# Altium PCB watch_PCB.PcbDoc
Units mm, origin at the board's own origin, x right, y up, seen from the top; angles counter-clockwise.
Board outline 152.4 x 101.6 mm, 2 copper layers (Top Layer, Bottom Layer); 64 components, 43 nets, 231 pads, 24 vias.
Unrouted connection lines stored in the file: 90.
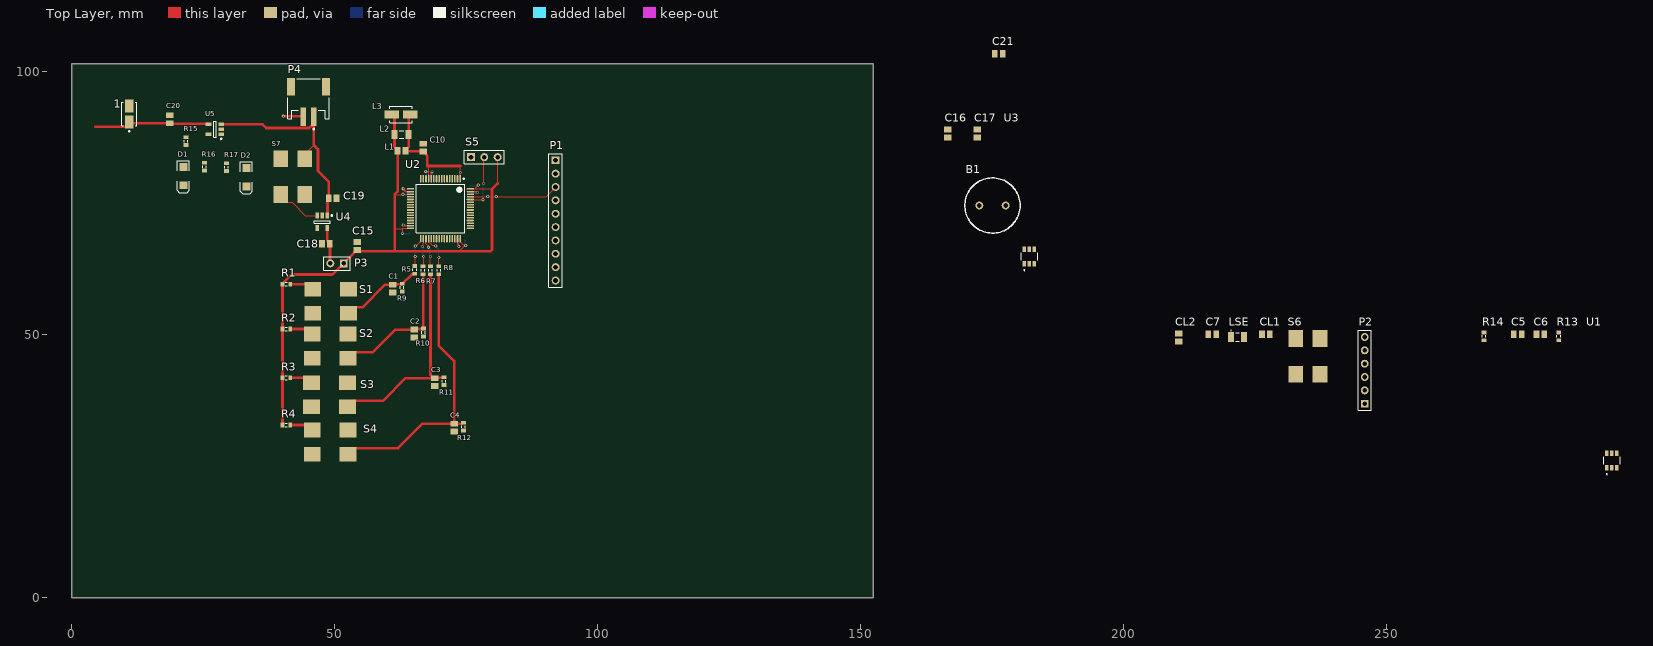
[diagram p0: Top Layer view]
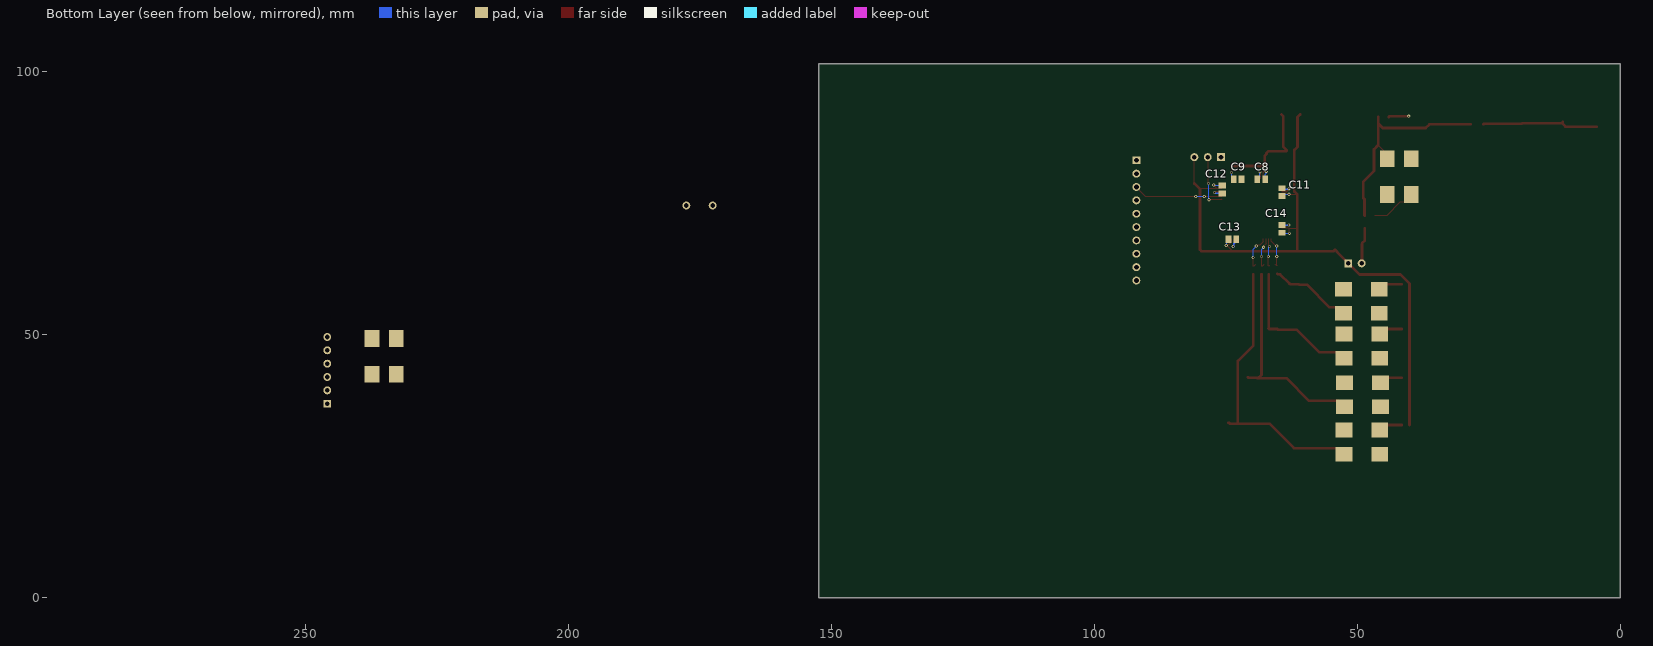
[diagram p1: Bottom Layer view, seen from below]

## Layer stack, top to bottom
Top Solder: solder mask 0.0102, Solder Resist, Dk 3.5
Top Layer: signal copper 0.035
Dielectric 1: dielectric 0.32, FR-4, Dk 4.8
Bottom Layer: signal copper 0.035
Bottom Solder: solder mask 0.0102, Solder Resist, Dk 3.5

## Board outline
0,0 152.4,0 152.4,101.6 0,101.6

## Design rules (kind name [scope] priority, off if disabled: settings)
Clearance [All] p1: gap=0.254 ignorepadtopadclearanceinfootprint=TRUE except(0: SMDPad-Hole THPad-Hole Via-Hole Fill-Hole Poly-Hole Region-Hole Text-Hole; 0.1: Arc-Arc Arc-Track Arc-SMDPad Arc-THPad Arc-Via Arc-Fill Arc-Poly Arc-Region Arc-Text Arc-Hole Track-Track Track-SMDPad Track-THPad Track-Via Track-Fill Track-Poly Track-Region Track-Text Track-Hole)
DiffPairsRouting [All] p1: maxlimit=0.254 minlimit=0.254 mostfreqgap=0.254 toplayer_minwidth=0.152 toplayer_maxwidth=0.381 toplayer_prefwidth=0.152 bottomlayer_minwidth=0.152 bottomlayer_maxwidth=0.381 bottomlayer_prefwidth=0.152 maxuncoupledlength=12.7
PolygonConnect [All] p1: connectstyle=Relief reliefconductorwidth=0.254 reliefentries=4 polygonreliefangle="90 Angle" airgapwidth=0.254
RoutingVias [All] p1: holewidth=0.33 width=0.6 viastyle="Through Hole" minholewidth=0.33 minwidth=0.6 maxholewidth=0.33 maxwidth=0.6
SolderMaskExpansion [All] p1: expansion=0.102 istentingtop=FALSE
Width trace_widths [All] p1: maxlimit=0.508 minlimit=0.152 preferedwidth=0.152 toplayer_minwidth=0.152 bottomlayer_prefwidth=0.152 minimp=50.000000 maximp=50.000000 favimp=50.000000
29 further rules are at their usual default settings.

## Classes and differential pairs
component class power_supply: 1 C18 C19 C20 C21 D1 D2 P3 P4 R15 R16 R17 S7 U4 U5
component class Motor_Driver_Schematic: B1 C16 C17 U3
component class MCU_Connections: C5 C6 C7 C8 C9 C10 C11 C12 C13 C14 C15 CL1 CL2 L1 L2 L3 LSE P1 P2 R13 R14 S5 S6 U1 U2
component class Button_connections: C1 C2 C3 C4 R1 R2 R3 R4 R5 R6 R7 R8 R9 R10 R11 R12 S1 S2 S3 S4
differential pair USB_D: +USB_D_P -USB_D_N

## Components (designator, comment, footprint, x,y, rotation, side; value= is the part's Value field where it differs from the comment)
1 "SMAJ5.0A-E3/5A" VISH-DO-214AC-2_N 10.9,92 r90 top
B1 "Motor: 316040004" RB5-10.5 175.1,74.6 r0 top
C1 "Cap" C0805 61.029,58.8 r90 top value=100nF
C2 "Cap" C0805 65.1,50.25 r90 top value=100nF
C3 "Cap" C0805 69,41 r90 top value=100nF
C4 "Cap" C0805 72.7,32.35 r90 top value=100nF
C5 "Cap" C0805 274.999,50.1 r0 top value=1uF
C6 "Cap" C0805 279.299,50.1 r0 top value=100nF
C7 "Cap" C0805 216.9,50.1 r0 top value=100nF
C8 "Cap" C0805 68.25,79.6 r180 bottom value=1uF
C9 "Cap" C0805 72.75,79.6 r0 bottom value=1uF
C10 "Cap" C0805 66.8,85.6 r270 top value=10nF
C11 "Cap" C0805 64.3,77.15 r270 bottom value=100nF
C12 "Cap" C0805 75.7,77.65 r90 bottom value=100nF
C13 "Cap" C0805 73.75,68.2 r0 bottom value=100nF
C14 "Cap" C0805 64.3,70.15 r270 bottom value=100nF
C15 "Cap" C0805 54.3,66.9 r270 top value=10uF
C16 "Cap" C0805 166.6,88.3 r90 top value=1uF
C17 "Cap" C0805 172.2,88.3 r90 top value=100nF
C18 "Cap" C0805 48.3,67.3 r0 top value=1uF
C19 "Cap" C0805 49.6,76 r180 top value=1uF
C20 "Cap" C0805 18.6,91 r270 top value=4.7uF
C21 "Cap" C0805 176.3,103.5 r0 top value=4.7uF
CL1 "Cap" C0805 227.099,50.1 r0 top value=TBD
CL2 "Cap" C0805 210.5,49.5 r90 top value=TBD
D1 "Orange LED" 3.2X1.6X1.1 21.2,80.2 r270 top
D2 "Green LED" 3.2X1.6X1.1 33.2,80 r270 top
L1 "" C0805 62.7,85 r180 top
L2 "" C1206 62.7,88.1 r180 top
L3 "35F0121-0SR-10" LIRD-35F0121-0SR-10_V 62.6,91.9 r180 top
LSE "CM315D32768HZFT" CMHT-CM315D-2_V 221.7,49.6 r0 top
P1 "LCD receptile" HDR1X10 92,83.2 r270 top
P2 "SWD connecctor" HDR1X6 245.899,36.9 r90 top
P3 "Header 2" HDR1X2 51.7,63.6 r180 top
P4 "JST-PH connector" "JST- S2B-PH-SM4-TB(LF)(SN)-2_V" 45,94.9 r180 top
R1 "Res3" J1-0603 40.8,59.65 r180 top value=100
R2 "Res3" J1-0603 40.8,51.1 r180 top value=100
R3 "Res3" J1-0603 40.8,41.85 r180 top value=100
R4 "Res3" J1-0603 40.8,32.85 r180 top value=100
R5 "Res3" J1-0603 65.2,62.35 r270 top value=10k
R6 "Res3" J1-0603 66.8,62.3 r270 top value=10k
R7 "Res3" J1-0603 68.2,62.3 r270 top value=10k
R8 "Res3" J1-0603 69.8,62.3 r270 top value=10k
R9 "Res3" J1-0603 62.814,59 r90 top value=10k
R10 "Res3" J1-0603 66.886,50.45 r90 top value=10k
R11 "Res3" J1-0603 70.786,41.2 r90 top value=10k
R12 "Res3" J1-0603 74.486,32.55 r90 top value=10k
R13 "Res3" J1-0603 282.799,49.7 r90 top value=40K
R14 "Res3" J1-0603 268.599,49.7 r90 top value=100K
R15 "Res3" J1-0603 21.7,86.85 r90 top value=10K
R16 "Res3" J1-0603 25.2,82 r270 top value=470
R17 "Res3" J1-0603 29.4,81.9 r90 top value=470
S1 "SW-DPST" PCBComponent_1 48,55.2 r180 top
S2 "SW-DPST" PCBComponent_1 47.9,46.65 r180 top
S3 "SW-DPST" PCBComponent_1 47.8,37.4 r180 top
S4 "SW-DPST" PCBComponent_1 47.9,28.4 r180 top
S5 "SW-SPDT" HDR1X3 75.9,83.8 r0 top
S6 "SW-DPST" PCBComponent_1 233.899,47.1 r90 top
S7 "SW-DPST" PCBComponent_1 40.8,81.3 r90 top
U1 "TPS22860DBVR" DBV0006A_N 292.899,26.1 r90 top value=Value
U2 "STM32L073RZT6" STM-LQFP64_M 70.1,74 r270 top
U3 "TPS22860DBVR" DBV0006A_N 182.1,64.9 r90 top value=Value
U4 "LD39015M33R" SOT23-5L_N 47.6,71.5 r270 top
U5 "MCP73831T-2ATI/OT" SOT-23-OT5_N 27.2,89.1 r180 top

## Footprints (in the part's own frame and the unit in brackets; to place one, negate y for a bottom-side part, rotate by r counter-clockwise, add the part's x,y. Pads: shape width x height; smd on the part's side, far side on the other; paste and mask are expansions set on the pad)
3.2X1.6X1.1 [mm] "SMT LED; 2 Flat Leads"
  rect 1.5x1.5 smd: 1(-1.75,0) 2(1.75,0)
  silkscreen extent -2.9,-1.15 3.2,1.15
C0805 [mm] "Chip Capacitor, Body 2.0x1.3mm, IPC High Density"
  rect 1.1x1.4 smd: 1(-0.75,0) 2(0.75,0)
  body extent -1.1,-0.72 1.1,0.72, height 1.4
C1206 [mm] "Chip Capacitor, Body 3.2x1.6mm, IPC High Density"
  rect 1.1x1.7 smd: 1(-1.35,0) 2(1.35,0)
  silkscreen extent -0.4,-0.75 0.4,0.75, body extent -1.7,-0.9 1.7,0.9, height 1.3
CMHT-CM315D-2_V [mm] "SMD, 2-Leads, Body 1.60x3.30mm, Pitch 2.50mm"
  rect 1.1x1.9 smd: 1(-1.25,0) 2(1.25,0)
  silkscreen extent -1.3,-0.8 0.3,1.32, body extent -1.65,-0.8 1.65,0.8, height 0.9
DBV0006A_N [mil]
  rect 41x24 smd paste+0 mask+3: 1(-53.15,37.4) 2(-53.15,0) 3(-53.15,-37.4) 4(53.15,-37.4) 5(53.15,0) 6(53.15,37.4)
  silkscreen extent -105,-62 29,62, body extent 0,0 10,10, height 10
HDR1X2 [mm] "Connector; Header; 2 Position"
  rect 1.5x1.5 hole 0.9: 1(0,0)
  round 1.5 hole 0.9: 2(2.54,0)
  silkscreen extent -1.27,-1.27 3.81,1.27
HDR1X3 [mm] "Connector; Header; 3 Position"
  rect 1.5x1.5 hole 0.9: 1(0,0)
  round 1.5 hole 0.9: 2(2.54,0) 3(5.08,0)
  silkscreen extent -1.27,-1.27 6.35,1.27
HDR1X6 [mm] "Connector; Header; 6 Position"
  rect 1.5x1.5 hole 0.9: 1(0,0)
  round 1.5 hole 0.9: 2(2.54,0) 3(5.08,0) 4(7.62,0) 5(10.16,0) 6(12.7,0)
  silkscreen extent -1.27,-1.27 13.97,1.27
HDR1X10 [mm] "Connector; Header; 10 Position"
  rect 1.5x1.5 hole 0.9: 1(0,0)
  round 1.5 hole 0.9: 2(2.54,0) 3(5.08,0) 4(7.62,0) 5(10.16,0) 6(12.7,0) 7(15.24,0) 8(17.78,0) 9(20.32,0) 10(22.86,0)
  silkscreen extent -1.27,-1.27 24.13,1.27
J1-0603 [mm] "Chip Resistor, Body 1.6x0.8mm, IPC High Density"
  rect 0.7x0.9 smd: 1(-0.75,0) 2(0.75,0)
  silkscreen extent -0.2,-0.35 0.2,0.35, body extent -0.85,-0.48 0.85,0.48, height 0.9
"JST- S2B-PH-SM4-TB(LF)(SN)-2_V" [mm] "SMD, 2-Leads, Body 7.9x7.6mm, Pitch 2mm"
  rect 1x3.5 smd: 1(-1,3.45) 2(1,3.45)
  rect 1.5x3.4 smd: MP1(-3.35,-2.3) MP2(3.35,-2.3)
  silkscreen extent -3.95,-3.8 3.95,5.87, body extent -3.95,-3.8 3.95,4.8, height 5.6
LIRD-35F0121-0SR-10_V [mm] "Molded Inductor, 2-Leads, Body 4.16x3.13mm"
  rect 2.77x1.47 smd: 1(-1.79,0) 2(1.79,0)
  silkscreen extent -2.1,-1.6 2.1,1.6, body extent -2.3,-1.57 2.3,1.57, height 3.05
PCBComponent_1 [mm]
  rect 3.2x2.8 all layers, no hole: 1(-4.6,1.1) 2(2.2,-3.5) 3(2.2,1.1) 4(-4.6,-3.5)
RB5-10.5 [mm] "Capacitor (Radial); 2 Leads"
  round 1.5 hole 0.9: 1(-2.5,0) 2(2.5,0)
  silkscreen extent -5.25,-5.25 5.25,5.25
SOT23-5L_N [mm] "SOT23, 5-Leads, Body 2.9x1.6mm, Pitch 0.95mm, Lead Span 2.8mm, IPC Medium Density"
  rect 1.1x0.65 smd: 1(-1.2,0.95) 2(-1.2,0) 3(-1.2,-0.95) 4(1.2,-0.95) 5(1.2,0.95)
  silkscreen extent -1.32,-1.5 0.25,1.95, body extent -0.87,-1.5 0.87,1.5, height 1.45
SOT-23-OT5_N [mm] "SOT23, 5-Leads, Body 2.9x1.7mm, Pitch 0.95mm, Lead Span 2.8mm, IPC Medium Density"
  rect 1.1x0.65 smd: 1(-1.2,0.95) 2(-1.2,0) 3(-1.2,-0.95) 4(1.2,-0.95) 5(1.2,0.95)
  silkscreen extent -1.33,-1.55 0.25,1.95, body extent -0.9,-1.55 0.9,1.55, height 1.45
STM-LQFP64_M [mm] "QFP, 64-Leads, Body 10x10mm, Pitch 0.5mm, IPC Low Density"
  oval 1.4x0.3 smd: 1(-5.7,3.75) 2(-5.7,3.25) 3(-5.7,2.75) 4(-5.7,2.25) 5(-5.7,1.75) 6(-5.7,1.25) 7(-5.7,0.75) 8(-5.7,0.25) 9(-5.7,-0.25) 10(-5.7,-0.75) 11(-5.7,-1.25) 12(-5.7,-1.75) 13(-5.7,-2.25) 14(-5.7,-2.75) 15(-5.7,-3.25) 16(-5.7,-3.75) 33(5.7,-3.75) 34(5.7,-3.25) 35(5.7,-2.75) 36(5.7,-2.25) 37(5.7,-1.75) 38(5.7,-1.25) 39(5.7,-0.75) 40(5.7,-0.25) 41(5.7,0.25) 42(5.7,0.75) 43(5.7,1.25) 44(5.7,1.75) 45(5.7,2.25) 46(5.7,2.75) 47(5.7,3.25) 48(5.7,3.75)
  oval 0.3x1.4 smd: 17(-3.75,-5.7) 18(-3.25,-5.7) 19(-2.75,-5.7) 20(-2.25,-5.7) 21(-1.75,-5.7) 22(-1.25,-5.7) 23(-0.75,-5.7) 24(-0.25,-5.7) 25(0.25,-5.7) 26(0.75,-5.7) 27(1.25,-5.7) 28(1.75,-5.7) 29(2.25,-5.7) 30(2.75,-5.7) 31(3.25,-5.7) 32(3.75,-5.7) 49(3.75,5.7) 50(3.25,5.7) 51(2.75,5.7) 52(2.25,5.7) 53(1.75,5.7) 54(1.25,5.7) 55(0.75,5.7) 56(0.25,5.7) 57(-0.25,5.7) 58(-0.75,5.7) 59(-1.25,5.7) 60(-1.75,5.7) 61(-2.25,5.7) 62(-2.75,5.7) 63(-3.25,5.7) 64(-3.75,5.7)
  silkscreen extent -5.82,-4.6 4.6,4.6, body extent -5,-5 5,5, height 1.6
VISH-DO-214AC-2_N [mm] "DO-214AC, 2-Leads, Body 4.5x2.79mm, IPC Medium Density"
  rect 2.4x1.55 smd: 1(-1.525,0) 2(1.525,0)
  silkscreen extent -3.4,-1.4 2.25,1.4, body extent -2.25,-1.4 2.25,1.39, height 2.29

## Part data
1: library part CMP-0548-00320-1, "Transient Voltage Suppressor, 6.40 to 231 V, 5 V Stand-off Voltage, Uni-Directional, -55 to 155 degC, 2-pin DO-214AC, Pb-Free, Tape and Reel", Manufacturer="Vishay Semiconductor", Operating Junction and Storage Temperature Range="-55 to 150 degC", ComponentLink1Description="Manufacturer URL", ComponentLink1URL=http://www.vishay.com/, ComponentLink2Description=Datasheet, ComponentLink2URL=http://www.vishay.com/docs/88390/smaj50a.pdf, ComponentLink3Description="Package Specification", ComponentLink3URL=http://www.vishay.com/docs/88390/smaj50a.pdf, DatasheetVersion=12/8/2013, ID (uA)=800, IFSM="40 A", Mounting Technology="Surface Mount", PackageDescription="2-Pin DO-214AC (SMA), Body 4.245 x 2.665 mm", PackageReference=DO-214AC-2, Packing="Tape and Reel", PartNumber=SMAJ5.0A-E3/5A, PPPM (W)="400, 300", RoHS=TRUE, VBR Uni-Directional (V)="6.4 to 231", VWM (V)=5
B1: library part Motor, "Motor, General Kind", LatestRevisionDate=17-Jul-2002, LatestRevisionNote="Re-released for DXP Platform.", PackageDescription="Capacitor (Radial); 2 Leads", PackageReference=RB5-10.5, Published=24-Mar-1999, Publisher="Altium Limited"
C1 C2 C3 C4 C5 C6 C7 C8 C9 C10 C11 C12 C13 C14 C15 C16 C17 C18 C19 C20 C21 CL1 CL2: "Capacitor", LatestRevisionDate=17-Jul-2002, LatestRevisionNote="Re-released for DXP Platform.", PackageDescription="Radial Cap, Thru-Hole; 2 Leads; 0.3 in Pin Spacing", PackageReference=RAD-0.3, Published=8-Jun-2000, Publisher="Altium Limited"
D1 D2: library part LED2, "Typical RED, GREEN, YELLOW, AMBER GaAs LED", LatestRevisionDate=17-Jul-2002, LatestRevisionNote="Re-released for DXP Platform.", PackageDescription="SM LED; 2 Flat Leads", PackageReference=3.2X1.6X1.1, PackageVersion=Feb-2002, Published=8-Jun-2000, Publisher="Altium Limited"
L1 L2: library part Inductor, "Inductor", Code_IEC=1005, Code_JEITA=0402, LatestRevisionDate=29-May-2009, LatestRevisionNote="IPC-7351 Footprint Added.", PackageDescription="Chip Inductor", PackageReference=0402-A, Published=8-Jun-2000, Publisher="Altium Limited"
L3: library part CMP-2000-05596-1, "EMI Filtering & RF Inductor, 10 A, 0.75 mOhm, -40 to 125 degC, 2-Pin SMD, RoHS, Tape and Reel", Current Rating (Max)=10A, DC Resistance (DCR) (Max)=0.75mOhm, Impedance @ Frequency=41Ohm@100MHz, Manufacturer=Laird, Operating Temperature=-40°C~125°C, Package / Case=2-SMD,J-Lead, Package Description="2-Pin Surface Mount Device, Body 4.06 x 3.05 mm", Ratings=-, Standard Package=1, Catalog Drawings=(28,35)F0121-0SR-10, Category=Filters, Datasheet URL=https://assets.lairdtech.com/home/brandworld/files/35F0121-0SR-10.pdf, Datasheet Version="Rev. F, 04/2015", Family=FerriteBeadsandChips, Filter Type=PowerLine, Kits=240-2227-ND-KITEMIFERRITEBEADCHIPSMD, Manufacturer URL=https://www.lairdtech.com/, Mounting Technology=SurfaceMount, Mounting Type=SurfaceMount, Number of Lines=1, Online Catalog=ChipBeads-PowerFiltering, Other Names=240-2520-1, Package Reference=35F0121-0SR-10, Package URL=http://cdn.lairdtech.com/home/brandworld/files/35F0121-0SR-10.pdf, Packaging=CutTape(CT), Series=35
LSE: library part CMP-2000-05089-1, "Turning Fork Crystal Unit, 32.768 KHz, -40 to 85 degC, 2-Pin SMD, RoHS, Tape and Reel. Note: Part from altium library is a DZFT, renamed to HZFT to reflect part that's actually going to be used", Manufacturer="Citizen Micro HumanTech", Package Description="2-Pin Surface Mount Device, Body 1.6 x 3.3 mm, Pitch 2.5 mm", Package Reference=CM315D-2, Package Version="Rev. 1.4, 09/2012", Datasheet URL=http://cfm.citizen.co.jp/english/product/pdf/CM315D.pdf, Datasheet Version="Rev. 1.4, 09/2012", Manufacturer URL=http://www.citizen-systems.com/us/start, Package URL=http://cfm.citizen.co.jp/english/product/pdf/CM315D.pdf
P1: library part "Header 10", "Header, 10-Pin", LatestRevisionDate=17-Jul-2002, LatestRevisionNote="Re-released for DXP Platform.", Publisher="Altium Limited"
P2: library part "Header 6", "Header, 6-Pin", LatestRevisionDate=17-Jul-2002, LatestRevisionNote="Re-released for DXP Platform.", Publisher="Altium Limited"
P3: "Header, 2-Pin", LatestRevisionDate=17-Jul-2002, LatestRevisionNote="Re-released for DXP Platform.", Publisher="Altium Limited"
P4: library part CMP-1755-00001-1, "Male Header, Pitch 2 mm, 1 x 2 Position, Height 5.5 mm, -25 to 85 degC, RoHS, Tape and Reel", Colour=Black, Current Rating="3 A", Max Operating Temperature=105degC, Min Operating Temperature=-65degC, Package Quantity=100, ComponentLink1Description="Manufacturer URL", ComponentLink1URL=http://www.jst.com/home2.html, ComponentLink2Description=Datasheet, ComponentLink2URL=http://www.jst-mfg.com/product/pdf/eng/ePH.pdf, Contact Finish=Lead, Contact Material=Bronze, Contact Plating=Tin, DatasheetVersion=Dec-12, Height="8.13 mm", Lead Pitch="0.1 inch", Length="101.19 mm", Mount="Through Hole", PackageDescription="Male Header, Pitch 2 mm, 1 x 2 Position, Height 5.5 mm", PackageReference=S2B-PH-SM4-TB(LF)(SN)-2, Packaging=Bulk, Pins=40, Radiation Hardening=No, RoHSCompliant=True, Width="2.34 mm"
R1 R2 R3 R4 R5 R6 R7 R8 R9 R10 R11 R12 R13 R14 R15 R16 R17: "Resistor", LatestRevisionDate=29-May-2009, LatestRevisionNote="IPC-7351 Footprint Added.", PackageDescription="Chip Resistor", PackageReference=J1-0603, Published=8-Jun-2000, Publisher="Altium Limited"
S1 S2 S3 S4 S6 S7: "Double-Pole, Single-Throw Switch", LatestRevisionDate=17-Jul-2002, LatestRevisionNote="Re-released for DXP Platform.", PackageDescription="Switch; 4 Leads", PackageReference=DPST-4, Published=24-Mar-1999, Publisher="Altium Limited"
S5: "SPDT Subminiature Toggle Switch, Right Angle Mounting, Vertical Actuation", ComponentLink1Description="Manufacturer Link", ComponentLink1URL=http://www.apem.com, DatasheetVersion=05-Dec-2000, LatestRevisionDate=17-Dec-2003, LatestRevisionNote="Schematic revised, PCB Footprint replaced.", PackageDescription="Switch; 4 Leads", PackageReference=TL36WW15050, Published=24-Mar-1999, Publisher="Altium Limited"
U1 U3: "small ultra-low leakage current single channel load switch", Manufacturer="Texas Instruments", Built_By=Texas_Instrument_Team, CompType=IC, Copyright="Copyright (C) 2018 Accelerated Designs. All rights reserved", Manufacturer_Part_Number=TPS22860DBVR, MountType=SMT, PackageReference=DBV0006A, PartNumber=TPS22860DBVR, RefDes=RefDes, RoHS=Y, Type=DEV, Vendor="Texas Instruments"
U2: library part CMP-1546-00073-1, "Ultra-Low-Power ARM Cortex-M0+ MCU, 192 KB Flash, 20 KB Internal RAM, 51 I/Os, 64-Pin LQFP, -40 to 85 degC, Tray", I/Os (High Current)=51, Operating Frequency(F) (Processor speed) (MHz)=32, Package Description="64-Pin Low-profile Quad Flat Package, Body 10 x 10 mm, Pitch 0.5 mm", Package Reference=LQFP64, Supply Voltage(Vcc) min (V)=1.8, ComponentLink1Description="Manufacturer URL", ComponentLink1URL=http://www.st.com/, ComponentLink2Description=Datasheet, ComponentLink2URL=http://www.st.com/st-web-ui/static/active/en/resource/technical/document/datasheet/DM00141036.pdf, Core="ARM Cortex-M0+", D/A Converter=2, Data E2PROM nom (B)=6144, DatasheetVersion="Rev. 2", FLASH Size (Prog) (kB)=192, Internal RAM Size (kB)=20, Mounting Technology="Surface Mount", Packing=Tray
U4: library part CMP-0244-00351-1, "150 mA Low Quiescent Current Low Noise Voltage Regulator, 3.3V, 5-Pin SOT-23, Tape and Reel", ComponentLink1Description="Manufacturer URL", ComponentLink1URL=http://www.st.com, ComponentLink2Description=Datasheet, ComponentLink2URL=http://www.st.com/internet/com/TECHNICAL_RESOURCES/TECHNICAL_LITERATURE/DATASHEET/CD00173477.pdf, DatasheetVersion=1/02/2009, PackageDescription="5-Pin SOT-23 Package, 2.9 x 1.6 mm Body, 0.95 mm Pitch, 2.8 mm Lead Span", PackageReference=SOT23-5L, PackageVersion=1/01/2008
U5: library part CMP-0133-00144-1, "Miniature Single-Cell, Fully Integrated Li-Ion, Li-Polymer Charge Management Controller, 4.2V, 5-Pin SOT-23, Industrial Temperature, Tape and Reel", Code_IPC=SOT23-5, DatasheetVersion="revE, Sep-2008", PackageDescription="5-Lead Plastic Small Outline Transistor (OT) [SOT-23]", PackageReference=SOT-23-OT5, PackageVersion="revBB, Aug-2009"

## Via types
v1: diameter 0.6, hole 0.33, Top Layer to Bottom Layer, 24 vias

## Nets (pads, with @x,y where several pads share a name; then routed paths per layer and width w, separated by ;. In a path a pad name is that pad's centre, name@x,y a point inside that pad or via, vN(x,y) a via of type N, cw(c..) or ccw(c..) an arc to the next point about the centre after c; other vN are vias at no path point)
ADC_Enable: U1.6 U2.25
ADC_IN0: R13.1 R14.2 U2.14
Backlight: P1.10 U2.50
BOOT0: S5.2 U2.60 | length 10.6
  Top Layer w0.152: U2.60 75.825,75.725 78.175,75.725 v1(78.2,75.7) ; v1(78.3,78.8) 78.37,78.87 78.37,83.73 S5.2
  Bottom Layer w0.152: v1(78.2,75.7) 78.25,75.75 78.25,78.75 v1(78.3,78.8)
D/C: P1.4 U2.59
GND: 1.2 B1.2 C1.1 C2.1 C3.1 C4.1 C5.1 C6.1 C7.2 C8.1 C9.1 C10.1 C11.1 C12.1 C13.1 C14.1 C15.1 C16.1 C17.1 C18.1 C19.1 C20.1 C21.1 CL1.1 CL2.1 D2.2 P1.1 P2.3 P4.2 R9.1 R10.1 R11.1 R12.1 R14.1 R15.1 S5.1 S6.2 S6.4 U1.2 U2.12 U2.18 U2.31 U2.47 U2.63 U3.2 U4.2 U5.2 | length 19.2
  Top Layer w0.152: U2.12 68.378,79.728 68.378,80.894 v1(68.489,81.005)
  Top Layer w0.254: v1(63,70.9) 63.139,70.9 63.289,70.75 U2.31 ; v1(63,77.8) 63.001,77.8 63.542,77.259 64.391,77.259 U2.18 ; U2.47@73.341,68.291 U2.47 73.35,67.189 73.6,66.939 v1(73.6,66.8) ; U2.63 76.91,77.25 77.072,77.089 v1(77.161,77.089)
  Top Layer w0.508: v1(40.2,91.6) 43.85,91.6 P4.2
  Bottom Layer w0.152: v1(68.489,81.005) 68.526,80.968 68.526,80.074 C8.1
  Bottom Layer w0.254: v1@62.9,70.8 64.2,70.8 C14.1 ; v1@62.9,77.7 64.1,77.7 C11.1 ; C13.1 72.8,68 73.5,67.3 v1@73.5,66.7 ; C12.1 76.781,76.9 76.782,76.901 77.001,76.901 v1@77.1,77
LCD_Reset: P1.3 U2.61 | length 17
  Top Layer w0.152: U2.61 75.825,76.275 79.075,76.275 v1(79.1,76.3) ; v1(80.7,76.3) 90.18,76.3 P1.3
  Bottom Layer w0.152: v1(79.1,76.3) v1(80.7,76.3)
MOSI: P1.7 U2.57
Net1_1: 1.1 C20.2 D1.1 U5.4 | length 22.3
  Top Layer w0.508: 4.425,89.6 10.379,89.6 10.9,90.121 1.1 11.125,90.25 C20.2 18.729,90.121 25.929,90.121 U5.4
NetB1_1: B1.1 C17.2 U3.1
NetC1_2: C1.2 R5.2 R9.2 S1.1 S1.3 | length 15.7
  Top Layer w0.508: S1.1 53.746,55.246 55.26,55.246 59.564,59.55 C1.2 61.133,59.654 62.718,59.654 R9.2 62.914,59.75 64.668,61.504 65.104,61.504 R5.2
NetC2_2: C2.2 R6.2 R10.2 S2.1 S2.3 | length 27.1
  Top Layer w0.508: S2.1 53.646,46.696 57.246,46.696 61.55,51 C2.2 65.204,51.104 66.79,51.104 R10.2 66.843,51.243 66.843,61.507 R6.2
NetC3_2: C3.2 R7.2 R11.2 S3.1 S3.3 | length 40.8
  Top Layer w0.508: S3.1 53.546,37.446 59.146,37.446 63.45,41.75 C3.2@68.85,41.75 ; R7.2 68.2,42.4 C3.2@68.85,41.75 ; R11.2 70.69,41.854 69.104,41.854 C3.2 C3.2@68.85,41.75
NetC4_2: C4.2 R8.2 R12.2 S4.1 S4.3 | length 54.1
  Top Layer w0.508: S4.1 53.646,28.446 62.053,28.446 66.707,33.1 C4.2 ; R8.2 69.8,47.918 72.7,45.018 C4.2 ; R12.2 74.386,33.3 74.186,33.1 C4.2
NetC6_2: C6.2 R13.2 U1.1
NetC18_2: C18.2 P3.2 U4.5 | length 7
  Top Layer w0.508: U4.5 48.55,67.95 49.05,67.45 C18.2 49.105,67.245 49.105,63.655 P3.2
NetCL1_2: CL1.2 LSE.1 U2.3
NetCL2_2: CL2.2 LSE.2 U2.4
NetD1_2: D1.2 R16.2
NetD2_1: D2.1 R17.1
NetR1_1: R1.1 S1.2 S1.4 | length 4.6
  Top Layer w0.508: R1.1 44.85,59.65 S1.2
NetR2_1: R2.1 S2.2 S2.4 | length 4.5
  Top Layer w0.508: R2.1 44.75,51.1 S2.2
NetR3_1: R3.1 S3.2 S3.4 | length 4.4
  Top Layer w0.508: R3.1 44.65,41.85 S3.2
NetR4_1: R4.1 S4.2 S4.4 | length 4.5
  Top Layer w0.508: R4.1 44.75,32.85 S4.2
NetR5_1: R5.1 U2.33 | length 6.3
  Top Layer w0.152: v1(65.3,64.9) 65.3,63.2 R5.1 65.3,63.1 R5.1@65.574,63.374 ; v1(65.3,66.9) 65.46,66.9 66.35,67.79 U2.33
  Bottom Layer w0.152: v1(65.3,64.9) v1(65.3,66.9)
NetR6_1: R6.1 U2.34 | length 5.5
  Top Layer w0.152: v1(66.7,66.8) 66.7,66.967 66.85,67.117 U2.34 ; R6.1@66.75,63.1 R6.1 66.9,63.15 v1(66.9,64.9)
  Bottom Layer w0.152: v1(66.7,66.8) 66.8,66.7 66.8,65 v1(66.9,64.9)
NetR7_1: R7.1 U2.35 | length 6.1
  Top Layer w0.152: U2.35 67.35,67.371 67.8,66.922 v1(67.8,66.661) ; R7.1@67.826,63.324 68.1,63.05 R7.1 v1(68.2,64.9)
  Bottom Layer w0.152: v1(67.8,66.661) 68.2,66.261 v1(68.2,64.9)
NetR8_1: R8.1 U2.36 | length 6.8
  Top Layer w0.152: U2.36 67.85,67.75 68.586,67.014 69.086,67.014 v1(69.2,66.9) ; R8.1@69.426,63.324 69.7,63.05 R8.1 v1(69.8,64.7)
  Bottom Layer w0.152: v1(69.2,66.9) 69.8,66.3 v1(69.8,64.7)
NetR15_2: R15.2 U5.5
NetR16_1: R16.1 R17.2 U5.1
NetS7_1: S7.1 S7.3 U2.24 U4.3 | length 8.7
  Top Layer w0.152: S7.1 39.7,76.5 41.024,75.176 41.92,75.176 44.396,72.7 U4.3
NetU2_26: U2.26 U3.6
NRST: C7.1 P2.5 S6.1 S6.3 U2.7
NSS: P1.6 U2.58
SCK: P1.8 U2.55
SWCLK: P2.2 U2.49
SWDIO: P2.4 U2.46
SWO: P2.6
USB_D_N: U2.44
USB_D_P: U2.45
Vbat: C5.2 C19.2 C21.2 P4.1 S7.2 S7.4 U1.4 U1.5 U4.1 U5.3 | length 41.6
  Top Layer w0.152: S7.2 44.3,84.394 46,86.094
  Top Layer w0.508: U5.3 36.284,90.05 36.988,89.346 45.146,89.346 P4.1@46,90.2 ; P4.1 P4.1@46,90.2 ; U4.1 48.621,72.771 48.621,75.771 C19.2 48.85,79.137 46.8,81.187 46.8,85.294 46,86.094 P4.1@46,90.2
VDD: C11.2 C12.2 C13.2 C14.2 C15.2 C16.2 L1.2 L2.2 L3.2 P1.2 P2.1 P3.1 R1.2 R2.2 R3.2 R4.2 S5.3 U2.19 U2.32 U2.48 U2.64 U3.4 U3.5 | length 135.6
  Top Layer w0.152: 61.4,70.1 61.45,70.15 62.8,70.15 ; 61.4,76.708 61.458,76.65 v1@62.879,76.65 ; v1(62.9,69.3) 62.9,70.175 62.975,70.25 ; 62.9,70.25 62.975,70.25 ; v1(62.979,76.75) U2.19 ; U2.32 62.975,70.25 ; 73.7,65.9 v1@74.7,66.9 ; U2.48 73.85,67.75 74.482,67.118 74.682,67.118 v1@74.8,67 ; U2.64 76.775,77.75 ; v1(77.3,78.5) 76.775,77.975 76.775,77.75 ; 79.9,77.6 79.85,77.65 79.75,77.75 76.775,77.75 ; 80.98,78.78 S5.3
  Top Layer w0.508: R4.2 R3.2 R2.2 R1.2 40.05,59.75 41.775,61.475 49.575,61.475 P3.1 53.854,65.754 53.854,65.854 54.15,66.15 C15.2 54.55,65.9 73.7,65.9 79.602,65.9 79.9,66.198 79.9,77.6 ; L3.2 60.869,91.9 61.35,91.419 L2.2 61.35,85.75 61.95,85.15 L1.2 61.95,77.258 61.4,76.708 61.4,70.1 61.4,66.15 ; 79.85,77.65 80.98,78.78
  Bottom Layer w0.152: v1@62.8,69.2 64.1,69.2 C14.2 C14.2@64.15,69.4 ; v1@62.879,76.65 64.05,76.65 C11.2 ; C13.2 74.8,67.9 v1@74.8,66.9 ; C12.2 v1@77.2,78.4
  other v1: 74.9,67
VDDA: C8.2 C9.2 C10.2 L1.1 L2.1 L3.1 U2.1 U2.13 | length 28.7
  Top Layer w0.152: v1(67.3,81.1) 67.418,80.982 67.743,80.982 67.85,80.875 ; 67.6,82.1 67.85,81.85 67.85,80.875 ; U2.13 67.85,80.875 ; U2.1@73.9,79.75 73.875,79.775 73.875,80.875 v1(73.9,80.9) 73.9,82.1
  Top Layer w0.508: L3.1 64.05,91.56 L2.1 64.05,85.75 63.45,85.15 L1.1 63.512,84.938 66.862,84.938 67.246,84.554 67.246,84.404 67.6,84.05 67.6,82.1 73.9,82.1
  Bottom Layer w0.152: v1@67.2,81 67.2,80.833 67.5,80.532 C8.2 ; C9.2 73.9,80 v1(73.9,80.9)
pads on no net: P1.5 P1.9 P4.MP1 P4.MP2 U1.3 U2.2 U2.5 U2.6 U2.8 U2.9 U2.10 U2.11 U2.15 U2.16 U2.17 U2.20 U2.21 U2.22 U2.23 U2.27 U2.28 U2.29 U2.30 U2.37 U2.38 U2.39 U2.40 U2.41 U2.42 U2.43 U2.51 U2.52 U2.53 U2.54 U2.56 U2.62 U3.3 U4.4

## Text inside footprints (layer, text, board x,y; h text height)
U1: Mechanical 7 "0.114in/2.896mm" at 293.217,30.498 h0.64 r90; Mechanical 7 "0.063in/1.6mm" at 288.404,24.036 h0.64 r90; Mechanical 7 "3.740157E-02in/.95mm" at 292.742,16.355 h0.64 r90; Mechanical 7 "Alt 2 Padstyle: OX90Y60D30P" at 307.047,17.527 h1.27 r90; Mechanical 7 "Alt 1 Padstyle: OX60Y90D30P" at 305.523,17.527 h1.27 r90; Mechanical 7 "Pin 1 Padstyle: RX41Y24D0T" at 300.951,17.845 h1.27 r90; Mechanical 7 "Default Padstyle: RX41Y24D0T" at 299.427,17.21 h1.27 r90
U3: Mechanical 7 "0.114in/2.896mm" at 182.417,69.298 h0.64 r90; Mechanical 7 "0.063in/1.6mm" at 177.604,62.836 h0.64 r90; Mechanical 7 "3.740157E-02in/.95mm" at 181.942,55.155 h0.64 r90; Mechanical 7 "Alt 2 Padstyle: OX90Y60D30P" at 196.247,56.327 h1.27 r90; Mechanical 7 "Alt 1 Padstyle: OX60Y90D30P" at 194.723,56.327 h1.27 r90; Mechanical 7 "Pin 1 Padstyle: RX41Y24D0T" at 190.151,56.645 h1.27 r90; Mechanical 7 "Default Padstyle: RX41Y24D0T" at 188.627,56.01 h1.27 r90